# EAGLE board haasoscope_pro_power_board - 5V (EAGLE 9.6.2)
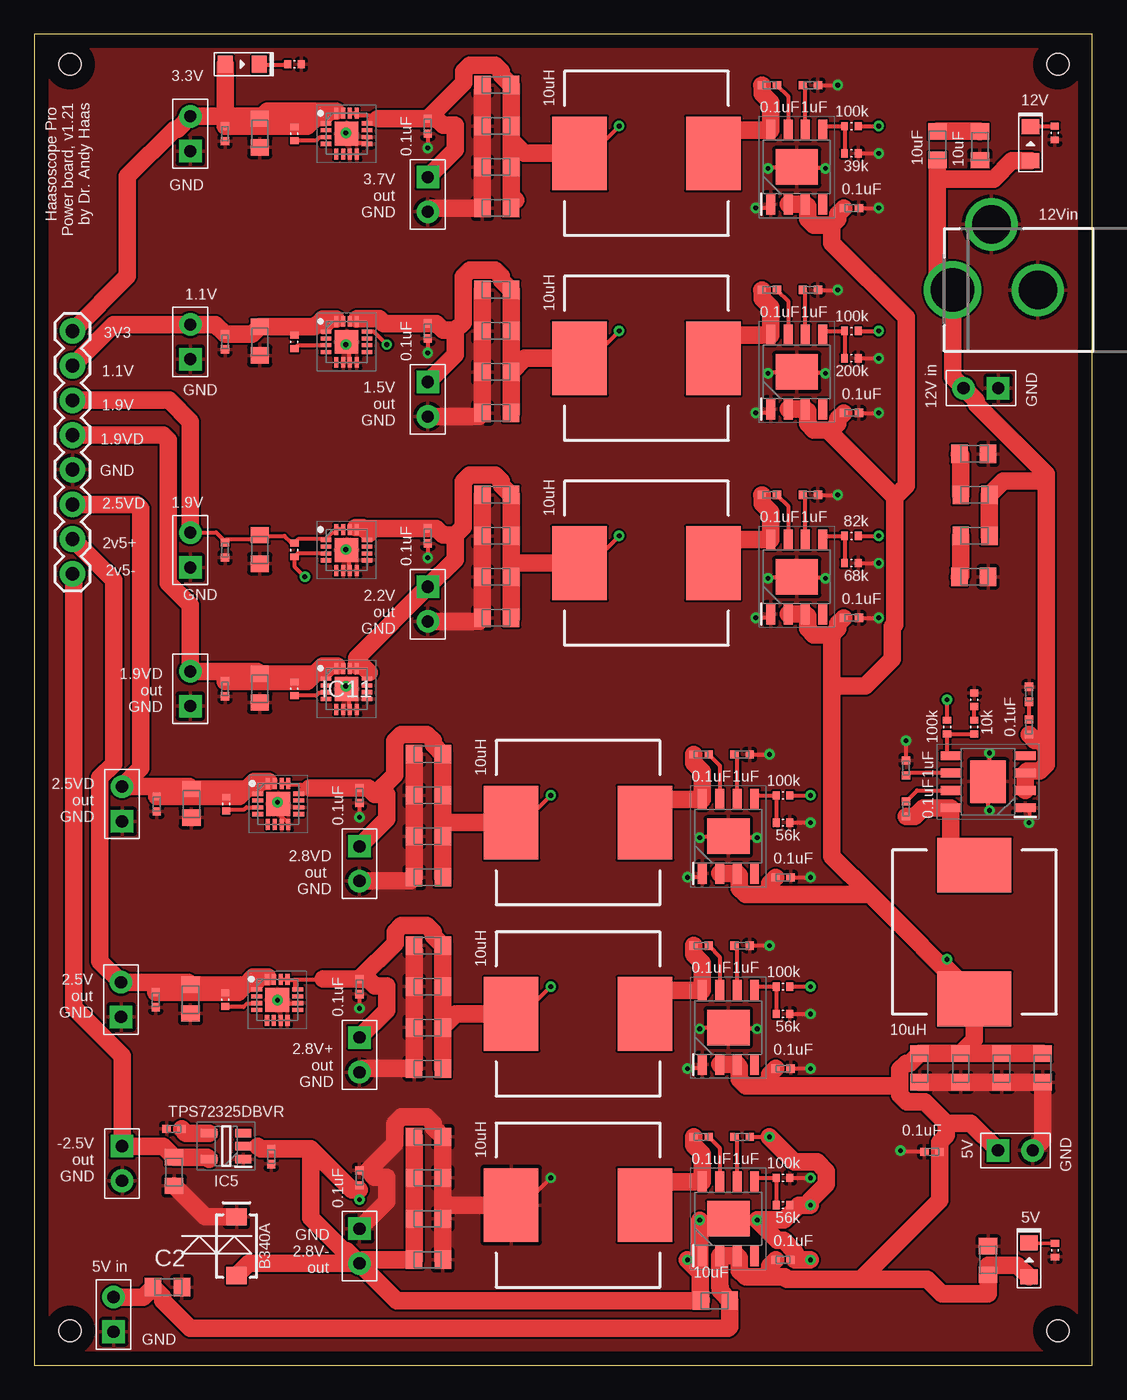
[diagram p0: board, top side]
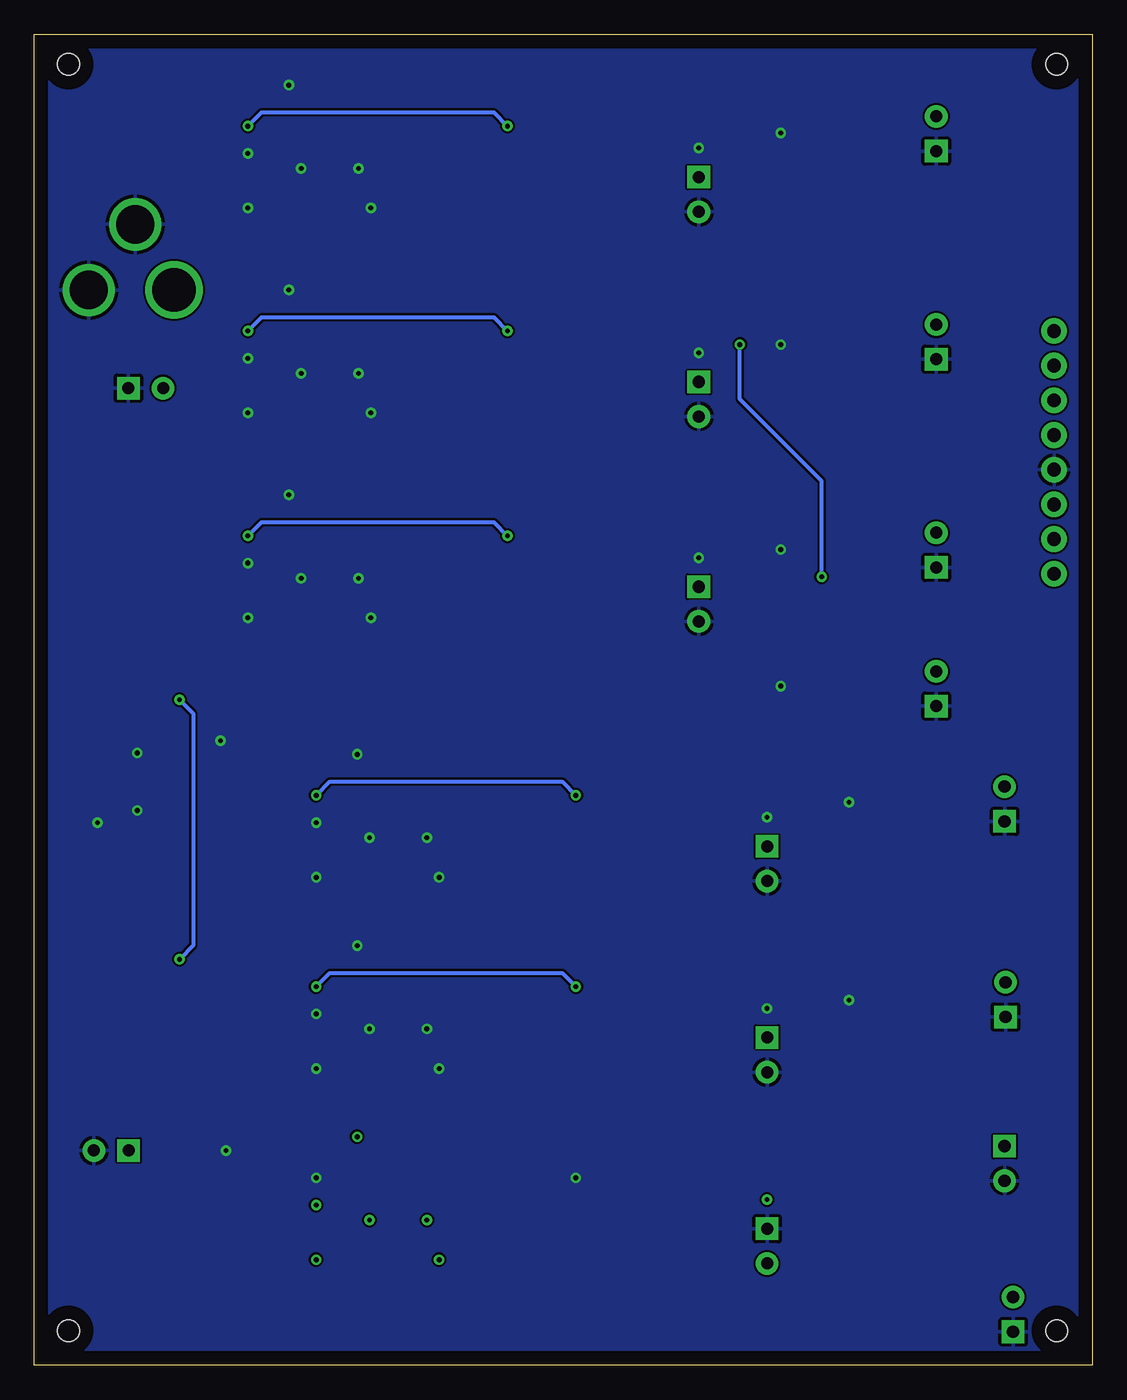
[diagram p1: board, bottom side, seen from below]

Size 77.45 x 97.46 mm. Coordinates in mm from the lower left corner, seen from the top.
Outline: 0,0 77.45,0 77.45,97.46 0,97.46 0,0
Copper layers (1*16): Top 0.035mm / dielectric 1.5mm / Bottom 0.035mm
Design rules "default *": minimum track width 6mil, minimum drill 0.35mm, track to track 6mil, track to pad 6mil, pad to pad 6mil, via to via 6mil, smd to smd 6mil, copper to edge 40mil, drill to drill 6mil, minimum pad ring 10mil, minimum via ring 8mil, stop-mask expansion 4mil, vias tented up to drill 0mil, thermal gap 10mil
Net classes: 0 default: width 0.305 mm; 1 power: width 0.406 mm; 2 gnd: width 0.305 mm
Holes 1.6 mm at 2.62,95.25 2.62,2.54 74.93,2.54 74.93,95.25

## Footprints (pad centres in the part's own frame; a part is rotated, then mirrored left to right if it is on the bottom)
RESC0805_N = smd 1.2 x 1.35: 1 -1.1,0; 2 1,0
RESC0402_N = smd 0.6 x 0.6: 1 -0.55,0; 2 0.55,0
DCJACK_2MM_PTH = drill 2.8: GND 0,7.35; GNDBREAK 4.8,10.75 | drill 3.2: PWR 0,13.6
LED0805 = smd 1.1 x 1.25: ANODE 1.25,0; CATHODE -1.25,0
SMA-DIODE = smd 1.27 x 1.47: A -2.15,0; C 2.15,0
QFN50P300X300X100-17N = smd 0.8 x 0.3: 1 -1.5,0.75; 2 -1.5,0.25; 3 -1.5,-0.25; 4 -1.5,-0.75; 9 1.5,-0.75; 10 1.5,-0.25; 11 1.5,0.25; 12 1.5,0.75 | smd 0.3 x 0.8: 5 -0.75,-1.5; 6 -0.25,-1.5; 7 0.25,-1.5; 8 0.75,-1.5; 13 0.75,1.5; 14 0.25,1.5; 15 -0.25,1.5; 16 -0.75,1.5 | smd 1.75 x 1.75: 17 0,0
SOT95P280X145-5N = smd 1.2 x 0.6: 1 -1.25,0.95; 2 -1.25,0; 3 -1.25,-0.95; 4 1.25,-0.95; 5 1.25,0.95
H2-2.54 = drill 0.889 pad 1.651 square: 1 0,1.27 | drill 0.889 pad 1.651: 2 0,-1.27
1X08 = drill 1.016 pad 1.88: 1 0,0; 2 2.54,0; 3 5.08,0; 4 7.62,0; 5 10.16,0; 6 12.7,0; 7 15.24,0; 8 17.78,0
CDRH125 = smd 5.4 x 4: 1 0,4.9; 2 0,-4.9
SOIC127P600X170-9N = smd 1.525 x 0.65: 1 -2.712,1.905; 2 -2.712,0.635; 3 -2.712,-0.635; 4 -2.712,-1.905; 5 2.712,-1.905; 6 2.712,-0.635; 7 2.712,0.635; 8 2.712,1.905 | smd 2.6 x 3.1: 9 0,0
RES-0402 = smd 0.5 x 0.6: P$1 -0.5,0; P$2 0.5,0

## Placement (x,y rotation side)
C1  10uF  [RESC0805_N]  69.81,7.73 90 top
C2  10uF  [RESC0805_N]  9.81,5.73 0 top
C3  10uF  [RESC0805_N]  66.11,89.35 90 top
C4  10uF  [RESC0805_N]  49.81,4.73 180 top
C5  22uF  [RESC0805_N]  64.81,21.73 270 top
C6  22uF  [RESC0805_N]  67.81,21.73 270 top
C7  0.1uF  [RESC0402_N]  59.81,69.73 0 top
C8  0.1uF  [RESC0402_N]  53.81,78.73 0 top
C9  1uF  [RESC0402_N]  56.81,78.73 0 top
C10  10uF  [RESC0805_N]  69.21,89.23 270 top
C11  10uF  [RESC0805_N]  16.51,90.17 270 top
C12  0.1uF  [RESC0402_N]  13.97,90.17 270 top
C13  0.01uF  [RESC0402_N]  10.24,17.32 180 top
C14  10uF  [RESC0805_N]  10.24,14.14 270 top
C15  22uF  [RESC0805_N]  28.81,13.73 180 top
C16  0.1uF  [RESC0402_N]  28.81,75.73 270 top
C17  0.1uF  [RESC0402_N]  59.81,54.73 0 top
C18  0.1uF  [RESC0402_N]  53.81,63.73 0 top
C19  10uF  [RESC0805_N]  16.51,59.69 270 top
C20  0.1uF  [RESC0402_N]  13.97,59.69 270 top
C21  10uF  [RESC0805_N]  16.51,74.93 270 top
C22  0.1uF  [RESC0402_N]  13.97,74.93 270 top
C23  1uF  [RESC0402_N]  56.81,63.73 0 top
C24  22uF  [RESC0805_N]  28.81,16.73 180 top
C25  0.1uF  [RESC0402_N]  28.81,60.73 270 top
C26  0.1uF  [RESC0402_N]  54.81,35.73 0 top
C27  0.1uF  [RESC0402_N]  17.35,15.29 270 top
C28  10uF  [RESC0805_N]  16.51,49.53 270 top
C29  0.1uF  [RESC0402_N]  13.97,49.53 270 top
C30  10uF  [RESC0805_N]  11.44,26.77 270 top
C31  0.1uF  [RESC0402_N]  48.81,44.73 0 top
C32  1uF  [RESC0402_N]  51.81,44.73 0 top
C33  22uF  [RESC0805_N]  28.81,10.73 180 top
C34  0.1uF  [RESC0402_N]  23.81,41.73 270 top
C35  0.1uF  [RESC0402_N]  8.9,26.77 270 top
C36  0.1uF  [RESC0402_N]  59.81,84.73 0 top
C37  0.1uF  [RESC0402_N]  53.81,93.73 0 top
C38  10uF  [RESC0805_N]  11.51,41.1 270 top
C39  0.1uF  [RESC0402_N]  54.81,21.73 0 top
C40  0.1uF  [RESC0402_N]  48.81,30.73 0 top
C41  1uF  [RESC0402_N]  51.81,30.73 0 top
C42  22uF  [RESC0805_N]  28.81,7.73 180 top
C43  0.1uF  [RESC0402_N]  8.97,41.1 270 top
C44  1uF  [RESC0402_N]  56.81,93.73 0 top
C45  0.1uF  [RESC0402_N]  72.81,49.13 90 top
C46  0.1uF  [RESC0402_N]  28.81,90.73 270 top
C47  0.1uF  [RESC0402_N]  23.81,27.73 270 top
C48  0.1uF  [RESC0402_N]  72.81,46.73 90 top
C49  0.1uF  [RESC0402_N]  63.81,40.73 90 top
C50  1uF  [RESC0402_N]  63.81,43.73 90 top
C51  22uF  [RESC0805_N]  70.81,21.73 270 top
C52  0.1uF  [RESC0402_N]  65.71,15.63 180 top
C53  0.1uF  [RESC0402_N]  54.81,7.73 0 top
C54  0.1uF  [RESC0402_N]  48.81,16.73 0 top
C55  1uF  [RESC0402_N]  51.81,16.73 0 top
C56  10uF  [RESC0805_N]  68.81,63.73 180 top
C57  0.1uF  [RESC0402_N]  23.81,13.73 270 top
C58  22uF  [RESC0805_N]  73.81,21.73 270 top
C59  10uF  [RESC0805_N]  68.81,60.73 180 top
C60  10uF  [RESC0805_N]  68.81,66.73 0 top
C61  22uF  [RESC0805_N]  28.81,27.73 180 top
C62  22uF  [RESC0805_N]  28.81,30.73 180 top
C63  22uF  [RESC0805_N]  28.81,24.73 180 top
C64  22uF  [RESC0805_N]  28.81,21.73 180 top
C65  22uF  [RESC0805_N]  33.81,75.73 180 top
C66  22uF  [RESC0805_N]  33.81,78.73 180 top
C67  22uF  [RESC0805_N]  33.81,72.73 180 top
C68  22uF  [RESC0805_N]  33.81,69.73 180 top
C69  22uF  [RESC0805_N]  28.81,41.73 180 top
C70  22uF  [RESC0805_N]  28.81,44.73 180 top
C71  22uF  [RESC0805_N]  28.81,38.73 180 top
C72  22uF  [RESC0805_N]  28.81,35.73 180 top
C73  10uF  [RESC0805_N]  68.81,57.73 0 top
C77  22uF  [RESC0805_N]  33.81,60.73 180 top
C78  22uF  [RESC0805_N]  33.81,63.73 180 top
C79  22uF  [RESC0805_N]  33.81,57.73 180 top
C80  22uF  [RESC0805_N]  33.81,54.73 180 top
C81  22uF  [RESC0805_N]  33.81,90.73 180 top
C82  22uF  [RESC0805_N]  33.81,93.73 180 top
C83  22uF  [RESC0805_N]  33.81,87.73 180 top
C84  22uF  [RESC0805_N]  33.81,84.73 180 top
CN1  12Vin  [DCJACK_2MM_PTH]  80.81,78.73 90 top
D1  green  [LED0805]  72.81,7.73 270 top
D3  green  [LED0805]  72.92,89.43 270 top
D5  green  [LED0805]  15.24,95.25 180 top
D6  B340A  [SMA-DIODE]  14.81,8.73 90 top
IC3  TPS7A7200RGTR  [QFN50P300X300X100-17N]  22.86,90.17 0 top
IC5  TPS72325DBVR  [SOT95P280X145-5N]  14.05,16.05 180 top
IC7  TPS7A7200RGTR  [QFN50P300X300X100-17N]  22.86,59.69 0 top
IC9  TPS7A7200RGTR  [QFN50P300X300X100-17N]  22.86,74.93 0 top
IC11  TPS7A7200RGTR  [QFN50P300X300X100-17N]  22.86,49.53 0 top
IC12  TPS7A7200RGTR  [QFN50P300X300X100-17N]  17.79,26.77 0 top
IC14  TPS7A7200RGTR  [QFN50P300X300X100-17N]  17.86,41.1 0 top
J1  2p-2.54  [H2-2.54]  5.81,3.73 180 top
J2  2p-2.54  [H2-2.54]  28.81,70.73 0 top
J3  2p-2.54  [H2-2.54]  69.29,71.54 270 top
J4  2p-2.54  [H2-2.54]  11.43,90.17 180 top
J5  2p-2.54  [H2-2.54]  28.81,55.73 0 top
J6  2p-2.54  [H2-2.54]  6.43,14.78 0 top
J7  2p-2.54  [H2-2.54]  23.81,36.73 0 top
J8  2p-2.54  [H2-2.54]  11.43,59.69 180 top
J9  2p-2.54  [H2-2.54]  23.81,22.73 0 top
J10  2p-2.54  [H2-2.54]  11.43,74.93 180 top
J11  2p-2.54  [H2-2.54]  71.81,15.73 90 top
J12  2p-2.54  [H2-2.54]  11.43,49.53 180 top
J13  2p-2.54  [H2-2.54]  6.36,26.77 180 top
J14  2p-2.54  [H2-2.54]  28.81,85.73 0 top
J15  2p-2.54  [H2-2.54]  6.43,41.1 180 top
J16  8pin  [1X08]  2.81,75.73 270 top
J20  2p-2.54  [H2-2.54]  23.81,8.73 0 top
L2  10uH  [CDRH125]  44.81,73.73 270 top
L3  10uH  [CDRH125]  44.81,88.73 270 top
L4  10uH  [CDRH125]  44.81,58.73 270 top
L5  10uH  [CDRH125]  39.81,39.73 270 top
L6  10uH  [CDRH125]  39.81,25.73 270 top
L7  10uH  [CDRH125]  68.81,31.73 0 top
L8  10uH  [CDRH125]  39.81,11.73 270 top
PS1  LMR33630ADDA  [SOIC127P600X170-9N]  55.81,87.73 90 top
PS3  LMR33630ADDA  [SOIC127P600X170-9N]  55.81,72.73 90 top
PS4  LMR33630ADDA  [SOIC127P600X170-9N]  55.81,57.73 90 top
PS5  LMR33630ADDA  [SOIC127P600X170-9N]  50.81,38.73 90 top
PS6  LMR33630ADDA  [SOIC127P600X170-9N]  50.81,24.73 90 top
PS7  LMR33630ADDA  [SOIC127P600X170-9N]  69.81,42.73 180 top
PS8  LMR33630ADDA  [SOIC127P600X170-9N]  50.81,10.73 90 top
R1  3.3k  [RES-0402]  74.71,8.43 90 top
R2  15k  [RES-0402]  68.81,48.73 270 top
R3  100k  [RES-0402]  59.81,75.73 0 top
R4  200k  [RES-0402]  59.81,73.73 180 top
R5  20k  [RES-0402]  19.05,90.17 270 top
R6  82k  [RES-0402]  59.81,60.73 0 top
R7  68k  [RES-0402]  59.81,58.73 180 top
R8  100k  [RES-0402]  54.81,41.73 0 top
R9  20k  [RES-0402]  19.05,59.69 270 top
R10  20k  [RES-0402]  19.05,74.93 270 top
R11  56k  [RES-0402]  54.81,39.73 180 top
R12  100k  [RES-0402]  54.81,27.73 0 top
R13  56k  [RES-0402]  54.81,25.73 180 top
R14  3.3k  [RES-0402]  74.7,90.22 90 top
R15  100k  [RES-0402]  66.81,46.73 90 top
R16  10k  [RES-0402]  68.81,46.73 270 top
R17  20k  [RES-0402]  13.98,26.77 270 top
R18  3.3k  [RES-0402]  19.05,95.25 180 top
R19  100k  [RES-0402]  54.81,13.73 0 top
R20  56k  [RES-0402]  54.81,11.73 180 top
R22  20k  [RES-0402]  19.05,49.53 270 top
R23  100k  [RES-0402]  59.81,90.73 0 top
R24  20k  [RES-0402]  14.05,41.1 270 top
R25  39k  [RES-0402]  59.81,88.73 180 top

## Library data of the parts
C1-C44 C46 C47 C49-C73 C77-C84 = Nordic_nRF
C45 C48 = Nordic_nRF; LCSC: C307331
CN1 = adafruit
D1 D3 D5 = MF_LEDs; HOUSEPART: NO; POPULATE: 1
D6 = SparkFun-DiscreteSemi; LCSC: C64982; PROD_ID: DIO-09886
IC3 IC7 IC9 IC11 IC12 IC14 = TPS7A7200RGTR; DESCRIPTION: 2A, Single Output, Very Low Input, Configurable Fixed (0.9 to 5.0V) Low-Dropout Linear Regulator; HEIGHT: 1mm; MANUFACTURER_NAME: Texas Instruments; MANUFACTURER_PART_NUMBER: TPS7A7200RGTR; MOUSER_PART_NUMBER: 595-TPS7A7200RGTR; MOUSER_PRICE-STOCK: https://www.mouser.co.uk/ProductDetail/Texas-Instruments/TPS7A7200RGTR?qs=N%2FGwOzoYEADhZqusv3bivA%3D%3D
IC5 = TPS72325DBVR; DESCRIPTION: TEXAS INSTRUMENTS - TPS72325DBVR - LDO, FIXED, -2.5V, 0.2A, SOT-23-5; HEIGHT: 1.45mm; MANUFACTURER_NAME: Texas Instruments; MANUFACTURER_PART_NUMBER: TPS72325DBVR; MOUSER_PART_NUMBER: 595-TPS72325DBVR; MOUSER_PRICE-STOCK: https://www.mouser.co.uk/ProductDetail/Texas-Instruments/TPS72325DBVR?qs=6zVL%252ByCp0mrCtYCk6%2F08lw%3D%3D
J1-J15 J20 = Seeed-Connector; MPN: P125-1102A0BS116A1
J16 = SparkFun-Connectors; PROD_ID: CONN-08438
L2-L8 = SparkFun-Passives; LCSC: C339970
PS1 PS3-PS8 = LMR33630ADDA; DESCRIPTION: SIMPLE SWITCHER 3.8V to 36V, 3A Synchronous Buck Converter With Ultra-Low EMI; HEIGHT: 1.7mm; MANUFACTURER_NAME: Texas Instruments; MANUFACTURER_PART_NUMBER: LMR33630ADDA; MOUSER_PART_NUMBER: 595-LMR33630ADDA; MOUSER_PRICE-STOCK: https://www.mouser.co.uk/ProductDetail/Texas-Instruments/LMR33630ADDA?qs=r5DSvlrkXmL3yj62Sna%2FpQ%3D%3D
R1-R20 R22-R25 = FlashPCB_Resistors

## Nets
1V1OUT: C21.1 C22.1 IC9.1 IC9.15 IC9.16 J10.2 J16.2 R10.P$1
1V5: C16.1 C65.1 C66.1 C67.1 C68.1 IC9.13 IC9.14 J2.1 L2.2 R3.P$2
1V9DOUT: C28.1 C29.1 IC11.1 IC11.15 IC11.16 J12.2 J16.4 R22.P$1
1V9OUT: C19.1 C20.1 IC7.1 IC7.15 IC7.16 J8.2 J16.3 R9.P$1
2V2: C25.1 C77.1 C78.1 C79.1 C80.1 IC7.12 IC7.13 IC7.14 IC11.12 IC11.13 IC11.14 J5.1 L4.2 R6.P$2
2V5-: C14.1 IC5.5 J6.1 J16.8
2V5DOUT: C38.1 C43.1 IC14.1 IC14.15 IC14.16 J15.2 J16.6 R24.P$1
2V5OUT: C30.1 C35.1 IC12.1 IC12.15 IC12.16 J13.2 J16.7 R17.P$1
2V8+: C47.1 C61.1 C62.1 C63.1 C64.1 IC12.12 IC12.13 IC12.14 J9.1 L6.2 R12.P$2
2V8-: C4.2 C15.2 C24.2 C27.1 C33.2 C42.2 C53.2 C55.2 C57.2 D6.A IC5.2 J20.2 PS8.1 PS8.9 R20.P$1
2V8D: C34.1 C69.1 C70.1 C71.1 C72.1 IC14.12 IC14.13 IC14.14 J7.1 L5.2 R8.P$2
3V3OUT: C11.1 C12.1 D5.ANODE IC3.1 IC3.15 IC3.16 J4.2 J16.1 R5.P$1
3V7: C46.1 C81.1 C82.1 C83.1 C84.1 IC3.12 IC3.13 IC3.14 J14.1 L3.2 R23.P$2
5V: C1.1 C2.1 C4.1 C5.1 C6.1 C7.1 C17.1 C26.1 C36.1 C39.1 C51.1 C52.1 C53.1 C58.1 D1.ANODE J1.2 J11.1 L7.2 PS1.2 PS1.3 PS3.2 PS3.3 PS4.2 PS4.3 PS5.2 PS5.3 PS6.2 PS6.3 PS8.2 PS8.3 R15.P$2
12V: C3.1 C48.1 C56.1 C59.1 CN1.PWR D3.ANODE J3.2 PS7.2 PS7.3
GND: C1.2 C2.2 C5.2 C6.2 C7.2 C9.2 C10.2 C11.2 C12.2 C13.2 C14.2 C15.1 C16.2 C17.2 C19.2 C20.2 C21.2 C22.2 C23.2 C24.1 C25.2 C26.2 C27.2 C28.2 C29.2 C30.2 C32.2 C33.1 C34.2 C35.2 C36.2 C38.2 C39.2 C41.2 C42.1 C43.2 C44.2 C45.2 C46.2 C47.2 C50.2 C51.2 C52.2 C57.1 C58.2 C60.2 C61.2 C62.2 C63.2 C64.2 C65.2 C66.2 C67.2 C68.2 C69.2 C70.2 C71.2 C72.2 C73.2 C77.2 C78.2 C79.2 C80.2 C81.2 C82.2 C83.2 C84.2 CN1.GND CN1.GNDBREAK D6.C IC3.7 IC3.8 IC3.9 IC3.10 IC3.17 IC5.1 IC7.6 IC7.7 IC7.8 IC7.9 IC7.17 IC9.6 IC9.7 IC9.8 IC9.17 IC11.6 IC11.7 IC11.8 IC11.9 IC11.17 IC12.7 IC12.8 IC12.10 IC12.17 IC14.7 IC14.8 IC14.10 IC14.17 J1.1 J2.2 J3.1 J4.1 J5.2 J6.2 J7.2 J8.1 J9.2 J10.1 J11.2 J12.1 J13.1 J14.2 J15.1 J16.5 J20.1 L8.2 PS1.1 PS1.9 PS3.1 PS3.9 PS4.1 PS4.9 PS5.1 PS5.9 PS6.1 PS6.9 PS7.1 PS7.9 R1.P$1 R2.P$1 R4.P$1 R7.P$1 R11.P$1 R13.P$1 R14.P$1 R18.P$1 R19.P$2 R25.P$1
N$1: C44.1 PS1.6
N$2: C45.1 C48.2
N$3: C3.2 C10.1
N$4: C13.1 IC5.4
N$5: D3.CATHODE R14.P$2
N$6: D5.CATHODE R18.P$2
N$7: D1.CATHODE R1.P$2
N$11: C37.1 L3.1 PS1.8
N$12: C37.2 PS1.7
N$13: PS1.5 R23.P$1 R25.P$2
N$14: R2.P$2 R16.P$1
N$15: C56.2 C60.1
N$16: C8.1 L2.1 PS3.8
N$17: C8.2 PS3.7
N$18: PS3.5 R3.P$1 R4.P$2
N$19: C9.1 PS3.6
N$20: C18.1 L4.1 PS4.8
N$21: C18.2 PS4.7
N$22: PS4.5 R6.P$1 R7.P$2
N$23: C23.1 PS4.6
N$24: C31.1 L5.1 PS5.8
N$25: C31.2 PS5.7
N$26: PS5.5 R8.P$1 R11.P$2
N$27: C32.1 PS5.6
N$28: C40.1 L6.1 PS6.8
N$29: C40.2 PS6.7
N$30: PS6.5 R12.P$1 R13.P$2
N$31: C41.1 PS6.6
N$32: C49.1 L7.1 PS7.8
N$33: C49.2 PS7.7
N$34: PS7.5 R15.P$1 R16.P$2
N$35: C50.1 PS7.6
N$36: C54.1 L8.1 PS8.8
N$37: C54.2 PS8.7
N$38: PS8.5 R19.P$1 R20.P$2
N$39: C55.1 PS8.6
N$40: C59.2 C73.1
PG1V1: IC9.3 R10.P$2
PG1V9: IC7.3 IC9.12 R9.P$2
PG1V9D: IC11.3 R22.P$2
PG2V5D: IC14.3 R24.P$2
PG3V3: IC3.3 R5.P$2
PG25: IC12.3 R17.P$2

## Tracks (layer width: path | path; a pad name or v marks a point on that pad's centre or on a via)
1V1OUT
  Top 0.305: R10.P$1 19.06,75.48 19.06,76.03 | 21.66,76.59 22.06,76.48 IC9.16 | IC9.1 21.31,75.73 21.2,76.13 | IC9.15 22.56,76.48 22.12,76.59
  Top 1.27: J16.2 5.82,76.2 J10.2 13.25,76.2 C22.1 15.96,75.48 C21.1 19.06,76.03 20.55,76.03 21.11,76.59 21.66,76.59 | 22.12,76.59 21.66,76.59 | 21.66,76.59 21.2,76.13
1V5  (via drill 0.35)
  Top 0.305: R3.P$2 v61.81,75.73 | v42.81,75.73 40.81,73.73 L2.2 | 23.61,76.59 23.56,76.48 IC9.13 IC9.14
  Top 1.27: 30.81,75.78 29.93,75.78 29.44,76.27 28.82,76.27 C16.1 25.59,76.28 25.25,76.62 23.64,76.62 23.61,76.59 | J2.1 30.81,74 30.81,75.78 | C68.1 C67.1 | C67.1 C65.1 C66.1 34.2,79.44 34.2,79.73 33.74,80.19 31.88,80.19 31.39,79.7 31.39,76.36 30.81,75.78 | C67.1 35.91,73.73 L2.2
  Bottom 0.305: v61.81,75.73 60.81,76.73 43.81,76.73 v42.81,75.73
1V9DOUT
  Top 0.305: R22.P$1 19.06,50.23 19.06,50.63 | 21.66,51.19 22.06,51.23 IC11.16 IC11.1 | IC11.15 22.56,50.98 22.17,51.19
  Top 1.27: J16.4 9.43,68.11 9.82,67.72 9.82,57.27 11.43,55.66 J12.2 16.34,50.8 C28.1 19.06,50.63 20.55,50.63 21.11,51.19 21.66,51.19 | 22.17,51.19 21.66,51.19 | 21.66,51.19 21.2,50.73 21.2,50.72 20.63,50.72 19.98,50.07 13.98,50.07 C29.1
1V9OUT
  Top 0.305: IC7.15 22.56,61.23 22.06,61.23 IC7.16 22.06,60.98 21.81,60.98 21.31,60.48 | 21.31,60.48 19.31,60.48 19.06,60.23 R9.P$1 18.81,60.23 18.31,60.73 16.56,60.73 C19.1 16.31,60.73 16.06,60.48 14.06,60.48 C20.1 13.81,60.48 13.31,60.98 12.06,60.98 J8.2 | 21.31,60.48 IC7.1
  Top 1.27: J16.3 9.89,70.65 11.43,69.11 J8.2
2V2  (via drill 0.35)
  Top 0.305: R6.P$2 v61.81,60.73 | v42.81,60.73 40.81,58.73 L4.2 | 23.56,50.98 IC11.13 | 23.56,50.98 24.06,51.19 | IC7.13 23.56,61.23 24.13,61.28 | IC7.12 24.31,60.48 24.52,60.89 | IC11.12 24.36,50.57 24.52,50.73 | IC7.14 23.27,61.35 23.55,61.35 | IC11.14 23.51,51.03 23.56,50.98
  Top 1.27: 30.81,60.78 29.93,60.78 29.44,61.27 28.82,61.27 C25.1 24.13,61.28 | 30.81,60.78 30.81,59 J5.1 23.61,51.8 23.61,51.19 24.06,51.19 24.52,50.73 | 24.13,61.28 24.06,61.35 23.55,61.35 | 24.13,61.28 24.52,60.89 | 34.91,58.73 C77.1 C78.1 34.2,64.44 34.2,64.73 33.74,65.19 31.88,65.19 31.39,64.7 31.39,61.36 30.81,60.78 | 34.91,58.73 C79.1 C80.1 | 34.91,58.73 L4.2
  Bottom 0.305: v61.81,60.73 60.81,61.73 43.81,61.73 v42.81,60.73
2V5-
  Top 1.27: J16.8 2.89,57.87 2.89,26.2 6.43,22.67 J6.1 9.44,16.05 C14.1 12.65,15.24 IC5.5
2V5DOUT
  Top 0.305: R24.P$1 14.06,41.73 14.06,41.65 | 16.2,42.29 16.31,41.98 IC14.1 | IC14.16 17.06,42.73 16.66,42.76 | IC14.15 17.56,42.73 17.17,42.76
  Top 1.27: J16.6 7.51,63.03 7.81,62.73 7.81,43.75 J15.2 11.34,42.37 C38.1 15.55,42.2 16.11,42.76 16.66,42.76 | 17.17,42.76 16.66,42.76 | 16.66,42.76 16.2,42.3 16.2,42.29 15.63,42.29 15,41.65 14.06,41.65 C43.1
2V5OUT
  Top 0.305: R17.P$1 14.06,27.48 14.06,27.87 | 16.59,28.43 17.06,28.48 IC12.16 | IC12.1 16.31,27.48 16.13,27.97 | IC12.15 17.56,28.48 17.1,28.43
  Top 1.27: J16.7 5.81,57.49 5.81,44.03 4.82,43.04 4.82,29.58 J13.2 11.27,28.04 C30.1 14.06,27.87 15.48,27.87 16.04,28.43 16.59,28.43 | 17.1,28.43 16.59,28.43 | 16.59,28.43 16.13,27.97 16.13,27.96 15.56,27.96 14.93,27.32 C35.1
2V8+  (via drill 0.35)
  Top 0.305: R12.P$2 v56.81,27.73 | v37.81,27.73 35.81,25.73 L6.2 | 18.56,28.23 18.06,28.23 IC12.14 | 19.06,28.23 19.06,27.48 IC12.12 | 18.56,28.23 19.06,28.23 | 18.56,28.23 IC12.13 | 19.06,28.23 20.56,28.23 21.16,28.28
  Top 1.27: L6.2 30.86,25.73 29.91,24.78 C63.1 | C47.1 23.82,28.27 24.44,28.27 24.93,27.78 25.81,27.78 25.81,26 J9.1 | C47.1 21.16,28.28 | C63.1 C61.1 C62.1 29.2,31.44 29.2,31.73 28.74,32.19 26.88,32.19 26.42,31.73 26.42,30.89 C47.1 | C63.1 C64.1
  Bottom 0.305: v56.81,27.73 55.81,28.73 38.81,28.73 v37.81,27.73
2V8-  (via drill 0.35)
  Top 0.305: C53.2 55.68,7.73 | PS8.1 48.62,7.73 v47.81,7.73 | R20.P$1 v56.81,11.73 | v52.91,10.63 50.91,10.63 PS8.9 48.81,10.73 v48.71,10.63 | C55.2 v53.81,16.73 | C57.2 23.81,12.84 v23.81,12.13 | IC5.2 15.31,15.98 15.81,15.98 16.36,16.05
  Top 1.27: J20.2 26.54,4.73 C4.2 48.81,4.82 48.75,4.88 48.75,6.79 48.71,6.83 | 23.81,12.84 23.23,12.84 20.24,15.84 | 20.24,15.84 C27.1 16.58,15.84 16.36,16.05 | J20.2 22.88,8.39 22.66,8.39 20.24,10.8 20.24,15.84 | v47.81,7.73 48.71,6.83 | v48.71,10.63 48.71,6.83 | v56.81,7.73 55.68,7.73 55.68,8.32 54.85,9.15 54.39,9.15 v52.91,10.63 52.92,10.64 54.89,10.64 55.97,11.73 v56.81,11.73 56.81,12.08 57.98,13.25 57.98,14.21 57.29,14.9 55.64,14.9 v53.81,16.73 | J20.2 15.69,7.46 D6.A | C24.2 C15.2 C33.2 C42.2 24.08,7.73 J20.2
2V8D  (via drill 0.35)
  Top 0.305: R8.P$2 v56.81,41.73 | v37.81,41.73 35.81,39.73 L5.2 | 18.56,42.48 19.56,42.48 20.16,42.28 19.56,42.23 19.56,41.98 IC14.12 | 18.56,42.48 IC14.13 | IC14.14 18.44,42.6 18.56,42.48
  Top 1.27: 24.93,41.78 25.81,41.78 25.81,40 J7.1 | 24.93,41.78 24.44,42.27 23.82,42.27 C34.1 20.16,42.28 | 29.91,39.73 C69.1 C70.1 29.2,45.44 29.2,45.73 28.74,46.19 26.88,46.19 26.39,45.7 26.39,43.24 24.93,41.78 | 29.91,39.73 C71.1 C72.1 | 29.91,39.73 L5.2
  Bottom 0.305: v56.81,41.73 55.81,42.73 38.81,42.73 v37.81,41.73
3V3OUT
  Top 0.305: R5.P$1 19.06,90.73 19.06,90.72 | 21.66,91.83 22.06,91.73 IC3.16 | IC3.1 21.31,90.98 21.2,91.37 | IC3.15 22.56,91.73 22.11,91.83
  Top 1.27: J16.1 6.81,79.73 6.81,87.05 10.28,90.51 10.5,90.51 J4.2 16.34,91.44 C11.1 17.07,91.83 21.66,91.83 | 22.11,91.83 21.66,91.83 | 21.66,91.83 21.2,91.37 21.2,91.36 20.63,91.36 20,90.72 19.06,90.72 C12.1 13.99,90.74 D5.ANODE
3V7  (via drill 0.35)
  Top 0.305: R23.P$2 v61.81,90.73 | v42.81,90.73 40.81,88.73 L3.2 | IC3.12 24.56,90.98 24.56,91.23 25.16,91.28 24.56,91.48 23.56,91.48 IC3.13 IC3.14 | C84.1 35.23,85.05 35.23,85.32
  Top 1.27: L3.2 35.86,88.73 34.91,89.68 C81.1 | C46.1 28.82,91.27 29.44,91.27 29.93,90.78 30.81,90.78 30.81,89 J14.1 | C46.1 25.16,91.28 | C81.1 C82.1 34.2,94.44 34.2,94.73 33.74,95.19 31.88,95.19 31.42,94.73 31.42,93.89 C46.1 | C81.1 C83.1 34.91,85.64 35.23,85.32
  Bottom 0.305: v61.81,90.73 60.81,91.73 43.81,91.73 v42.81,90.73
5V  (via drill 0.35)
  Top 0.305: R15.P$2 v66.81,48.73 | v66.81,29.73 68.81,27.73 L7.2
  Top 1.27: 58.37,83.47 58.83,83.93 58.83,84.3 C36.1 | 58.37,83.47 57.06,83.47 56.6,83.93 56.6,84.86 PS1.3 PS1.2 | 58.37,68.47 58.83,68.93 58.83,69.3 C7.1 | 58.37,68.47 57.06,68.47 56.6,68.93 56.6,69.86 PS3.3 PS3.2 | 58.37,53.47 58.83,53.93 58.83,54.3 C17.1 | 58.37,53.47 57.06,53.47 56.6,53.93 56.6,54.86 PS4.3 PS4.2 | 53.37,34.47 53.83,34.93 53.83,35.3 C26.1 | 53.37,34.47 52.06,34.47 51.6,34.93 51.6,35.86 PS5.3 PS5.2 | 53.37,20.47 53.83,20.93 53.83,21.3 C39.1 | 53.37,20.47 52.06,20.47 51.6,20.93 51.6,21.86 PS6.3 PS6.2 | 53.37,6.47 53.83,6.93 53.83,7.3 C53.1 | 53.37,6.47 52.06,6.47 51.6,6.93 51.6,7.86 PS8.3 PS8.2 50.17,5.75 50.2,5.73 50.2,5.44 C4.1 50.91,2.83 50.81,2.73 11.42,2.73 9.42,4.73 9.42,5.02 C2.1 7.98,5 J1.2 | 66.76,17.73 66.76,16.85 66.26,16.34 C52.1 66.26,12.08 60.48,6.31 | J11.1 68.54,17.73 66.76,17.73 | 53.37,6.47 54.93,6.47 55.09,6.31 60.48,6.31 | D1.ANODE 71.95,7.34 69.81,7.34 C1.1 69.81,5.23 69.79,5.24 66.41,5.24 65.34,6.31 60.48,6.31 | 53.37,34.47 61.17,34.47 | 61.17,34.47 L7.2 68.81,23.83 C6.1 | 58.37,53.47 58.37,49.73 | 58.37,49.73 58.37,37.27 61.17,34.47 | 58.37,68.47 58.37,68.17 62.98,63.56 | 62.98,63.56 62.98,54.25 62.81,54.08 62.81,51.73 60.81,49.73 58.37,49.73 | 58.37,83.47 58.37,82.17 63.81,76.73 63.81,64.4 62.98,63.56 | C6.1 C5.1 64.1,22.12 63.81,22.12 63.35,21.66 63.35,20.73 | C6.1 C51.1 C58.1 | 63.35,20.73 63.35,19.8 63.84,19.31 65.18,19.31 66.76,17.73 | 53.37,20.47 63.09,20.47 63.35,20.73
  Bottom 0.305: v66.81,48.73 65.81,47.73 65.81,30.73 v66.81,29.73
12V
  Top 1.27: 74.07,45.29 73.61,45.75 73.24,45.75 C48.1 | 74.07,45.29 74.07,43.98 73.61,43.52 72.68,43.52 PS7.3 PS7.2 | 74.07,45.29 74.07,64.73 | 74.07,64.73 74.07,65.26 68.94,70.39 68.94,70.61 J3.2 67.21,72.34 67.21,77.73 | 67.21,77.73 CN1.PWR | C3.1 66.11,86.73 | 66.11,86.73 66.11,78.83 67.21,77.73 | D3.ANODE 71.55,88.18 70.21,86.84 66.22,86.84 66.11,86.73 | C59.1 C56.1 70.91,64.73 74.07,64.73
GND  (via drill 0.35)
  Top 0.305: R25.P$1 v61.81,88.73 | C36.2 v61.81,84.73 | PS1.1 53.62,84.73 v52.81,84.73 | v57.91,87.63 55.91,87.63 PS1.9 53.81,87.73 v53.71,87.63 | C44.2 v58.81,93.73 | C46.2 v28.81,89.13 | C7.2 v61.81,69.73 | PS3.1 53.62,69.73 v52.81,69.73 | R4.P$1 v61.81,73.73 | v57.91,72.63 55.91,72.63 PS3.9 53.81,72.73 v53.71,72.63 | C9.2 v58.81,78.73 | C16.2 v28.81,74.13 | R7.P$1 v61.81,58.73 | C17.2 v61.81,54.73 | PS4.1 53.62,54.73 v52.81,54.73 | v57.91,57.63 55.91,57.63 PS4.9 53.81,57.73 v53.71,57.63 | C23.2 v58.81,63.73 | C25.2 v28.81,59.13 | R11.P$1 v56.81,39.73 | C26.2 v56.81,35.73 | PS5.1 48.62,35.73 v47.81,35.73 | v52.91,38.63 50.91,38.63 PS5.9 48.81,38.73 v48.71,38.63 | C32.2 v53.81,44.73 | C34.2 v23.81,40.13 | R13.P$1 v56.81,25.73 | C39.2 v56.81,21.73 | PS6.1 48.62,21.73 v47.81,21.73 | v52.91,24.63 50.91,24.63 PS6.9 48.81,24.73 v48.71,24.63 | C41.2 v53.81,30.73 | C47.2 v23.81,26.13 | v69.91,44.83 69.91,42.83 PS7.9 69.81,40.73 v69.91,40.63 | C50.2 v63.81,45.73 | C52.2 63.41,15.63 v63.41,15.73 | R19.P$2 v56.81,13.73 | v37.81,13.73 35.81,11.73 L8.2 | IC12.17 v17.81,26.73 18.06,26.48 19.06,26.48 IC12.10 | IC14.17 18.06,40.98 18.06,40.23 18.56,39.73 IC14.8 | IC11.17 23.06,49.48 23.06,48.23 IC11.7 | IC7.17 23.06,59.48 23.06,58.23 IC7.7 | IC9.17 23.06,74.73 23.06,73.48 IC9.7 | IC3.17 23.06,89.98 23.56,89.48 24.31,89.48 IC3.9 | PS7.1 72.81,40.54 v72.81,39.73
  Top 1.27: 30.86,11.73 L8.2 29.91,11.73 | J20.1 25.81,12 25.81,13.78 24.93,13.78 24.44,14.27 26.39,16.22 26.39,17.7 26.88,18.19 28.74,18.19 29.2,17.73 29.2,17.44 C24.1 C15.1 29.91,11.73 | D6.C 12.5,10.88 C14.2 | J9.2 24.08,21.73 C64.2 C63.2 C61.2 27.81,30.27 27.85,30.3 | C42.1 C33.1 29.91,11.73 | C70.2 C69.2 C71.2 C72.2 27.54,35.46 J7.2 | J5.2 32.54,54.46 C80.2 C79.2 C77.2 C78.2 | C66.2 C65.2 C67.2 C68.2 32.54,69.46 J2.2 | 32.84,93.3 32.81,93.27 C81.2 C83.2 C84.2 29.08,84.73 J14.2 | C5.2 C6.2 C51.2 C58.2 73.81,16.46 J11.2
  other vias: 22.81,59.73 22.81,49.73 17.81,41.23 22.81,74.73 22.81,90.23
  pour Bottom: -2.54,100.33 78.74,100.33 78.74,-1.27 -2.54,-1.27
  pour Top: -1.27,99.06 80.01,99.06 80.01,-2.54 -1.27,-2.54
N$1
  Top 0.305: PS1.6 56.45,93.55 C44.1
N$2
  Top 0.305: C48.2 C45.1
N$3
  Top 1.27: C3.2 69.19,90.35 C10.1
N$4
  Top 1.27: IC5.4 11.11,17 C13.1
N$5
  Top 0.305: R14.P$2 74.56,90.73 73.06,90.73 D3.CATHODE
N$6
  Top 0.305: R18.P$2 18.31,95.23 16.56,95.23 D5.CATHODE
N$7
  Top 0.305: D1.CATHODE R1.P$2
N$11
  Top 1.27: L3.1 51.42,90.44 PS1.8 53.91,92.47 53.27,93.1 53.27,93.72 C37.1
N$12
  Top 0.305: C37.2 55.17,92.92 PS1.7
N$13
  Top 0.305: R25.P$2 R23.P$1 58,90.73 PS1.5
N$14
  Top 0.305: R16.P$1 R2.P$2
N$15
  Top 1.27: C56.2 67.81,66.63 C60.1
N$16
  Top 1.27: L2.1 51.42,75.44 PS3.8 53.91,77.47 53.27,78.1 53.27,78.72 C8.1
N$17
  Top 0.305: C8.2 55.17,77.92 PS3.7
N$18
  Top 0.305: R4.P$2 R3.P$1 58,75.73 PS3.5
N$19
  Top 0.305: PS3.6 56.45,78.55 C9.1
N$20
  Top 1.27: L4.1 51.42,60.44 PS4.8 53.91,62.47 53.27,63.1 53.27,63.72 C18.1
N$21
  Top 0.305: C18.2 55.17,62.91 PS4.7
N$22
  Top 0.305: R7.P$2 R6.P$1 58,60.73 PS4.5
N$23
  Top 0.305: PS4.6 56.45,63.55 C23.1
N$24
  Top 1.27: L5.1 46.42,41.44 PS5.8 48.91,43.47 48.27,44.1 48.27,44.72 C31.1
N$25
  Top 0.305: C31.2 50.17,43.91 PS5.7
N$26
  Top 0.305: R11.P$2 R8.P$1 53,41.73 PS5.5
N$27
  Top 0.305: PS5.6 51.45,44.55 C32.1
N$28
  Top 1.27: L6.1 46.42,27.44 PS6.8 48.91,29.47 48.27,30.1 48.27,30.72 C40.1
N$29
  Top 0.305: C40.2 50.17,29.92 PS6.7
N$30
  Top 0.305: R13.P$2 R12.P$1 53,27.73 PS6.5
N$31
  Top 0.305: PS6.6 51.45,30.55 C41.1
N$32
  Top 1.27: L7.1 67.1,38.34 PS7.8 65.07,40.83 64.44,40.19 63.82,40.19 C49.1
N$33
  Top 0.305: C49.2 64.62,42.09 PS7.7
N$34
  Top 0.305: R16.P$2 R15.P$1 66.81,44.92 PS7.5
N$35
  Top 0.305: PS7.6 63.99,43.37 C50.1
N$36
  Top 1.27: L8.1 46.42,13.44 PS8.8 48.91,15.47 48.27,16.1 48.27,16.72 C54.1
N$37
  Top 0.305: C54.2 50.17,15.91 PS8.7
N$38
  Top 0.305: R20.P$2 R19.P$1 53,13.73 PS8.5
N$39
  Top 0.305: PS8.6 51.45,16.55 C55.1
N$40
  Top 1.27: C73.1 67.81,57.83 C59.2
PG1V1
  Top 0.305: R10.P$2 19.3,74.68 IC9.3
PG1V9  (via drill 0.35)
  Top 0.305: v19.81,57.73 19.05,58.49 R9.P$2 19.06,59.23 19.31,59.48 21.31,59.48 IC7.3 | v25.81,74.73 24.86,75.68 IC9.12
  Bottom 0.305: v19.81,57.73 19.81,64.73 25.81,70.73 v25.81,74.73
PG1V9D
  Top 0.305: IC11.3 21.32,49.23 20.83,49.23 20.63,49.03 R22.P$2
PG2V5D
  Top 0.305: R24.P$2 14.16,40.71 15.39,40.71 15.53,40.85 IC14.3
PG3V3
  Top 0.305: IC3.3 21.32,89.88 20.83,89.88 20.63,89.67 R5.P$2
PG25
  Top 0.305: R17.P$2 14.06,26.23 15.31,26.23 15.56,26.48 16.06,26.48 IC12.3

## Text on the board
tPlace: 3.3V | Haasoscope Pro / Power board, v1.21 / by Dr. Andy Haas | 12V | GND | 3.7V / out / GND | 1.1V | 3V3 | 1.1V | 12V in | GND | GND | 1.5V / out / GND | 1.9V | 1.9VD | GND | 2.5VD | 1.9V | 2v5+ | 2v5- | GND | 2.2V / out / GND | 1.9VD / out / GND | 2.5VD / out / GND | 2.8VD / out / GND | 2.5V / out / GND | 2.8V+ / out / GND | -2.5V / out / GND | GND | 5V | GND / 2.8V- / out | 5V | 5V in | GND